# Altium PCB SW8-AcousticsPowerBoard.PcbDoc
Units mil, origin at the board's own origin, x right, y up, seen from the top; angles counter-clockwise.
Board outline 4500 x 2700 mil, 4 copper layers (Top Layer, Layer 1, PWR_OUT, GND), stack 23.756 mil thick; 32 components, 19 nets, 111 pads, 38 vias.
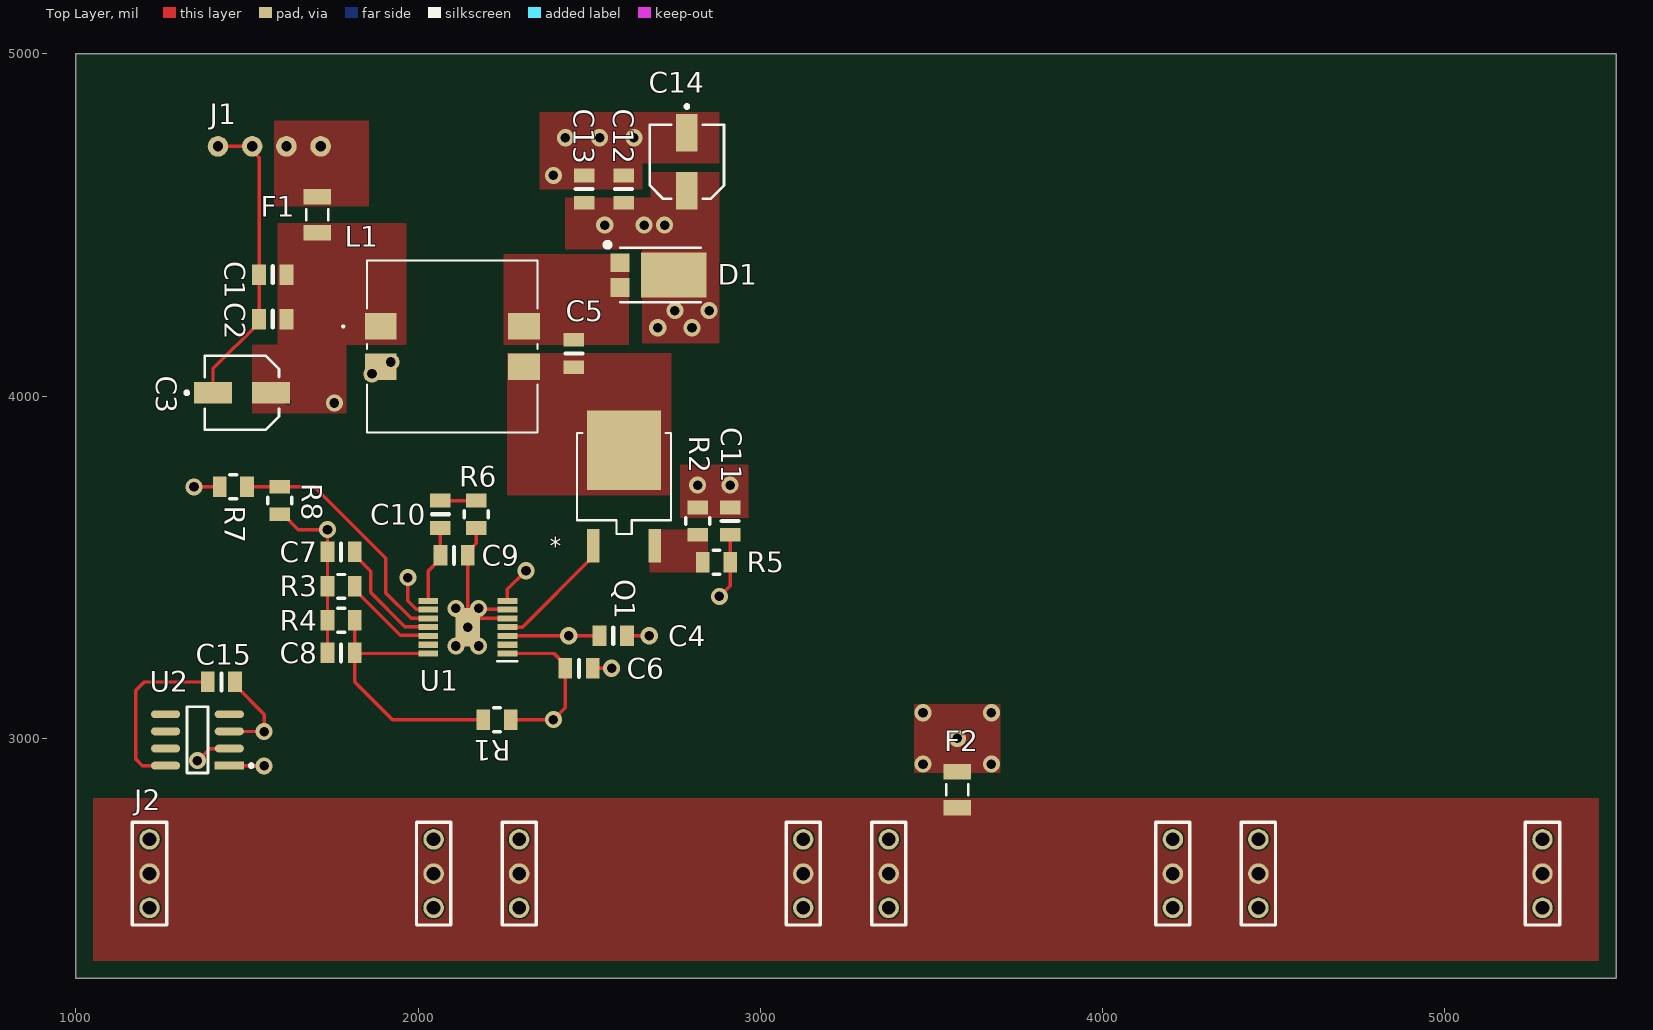
[diagram p0: Top Layer view]
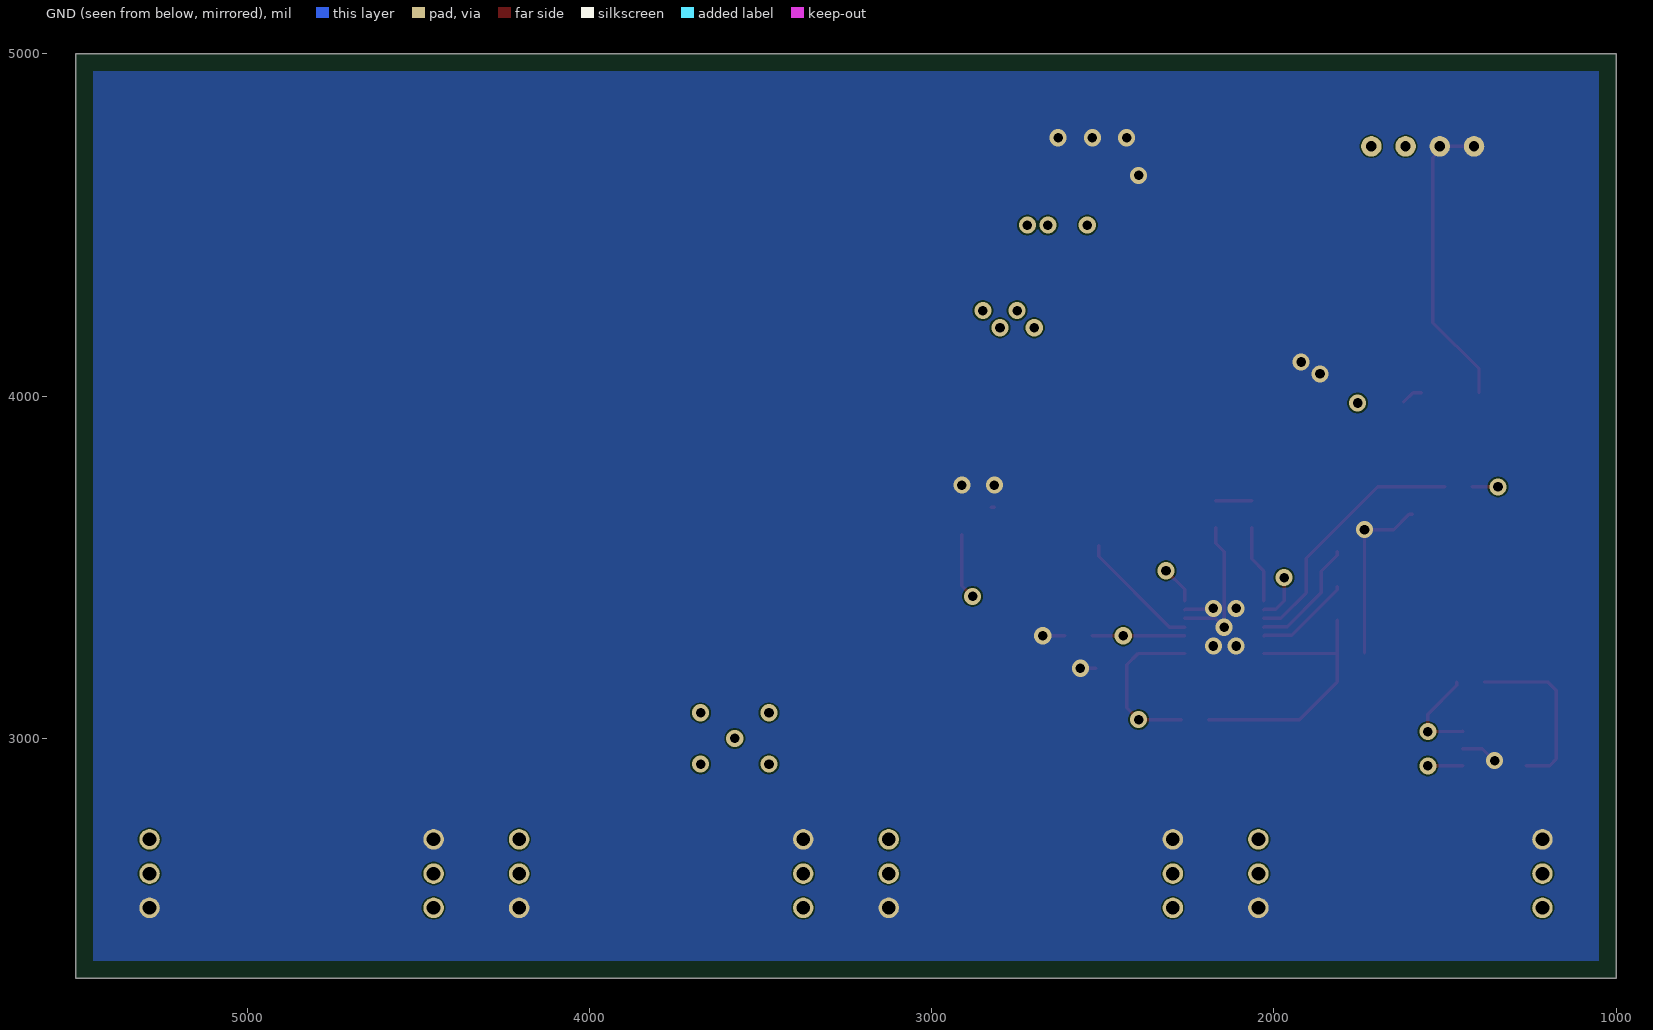
[diagram p1: GND view, seen from below]
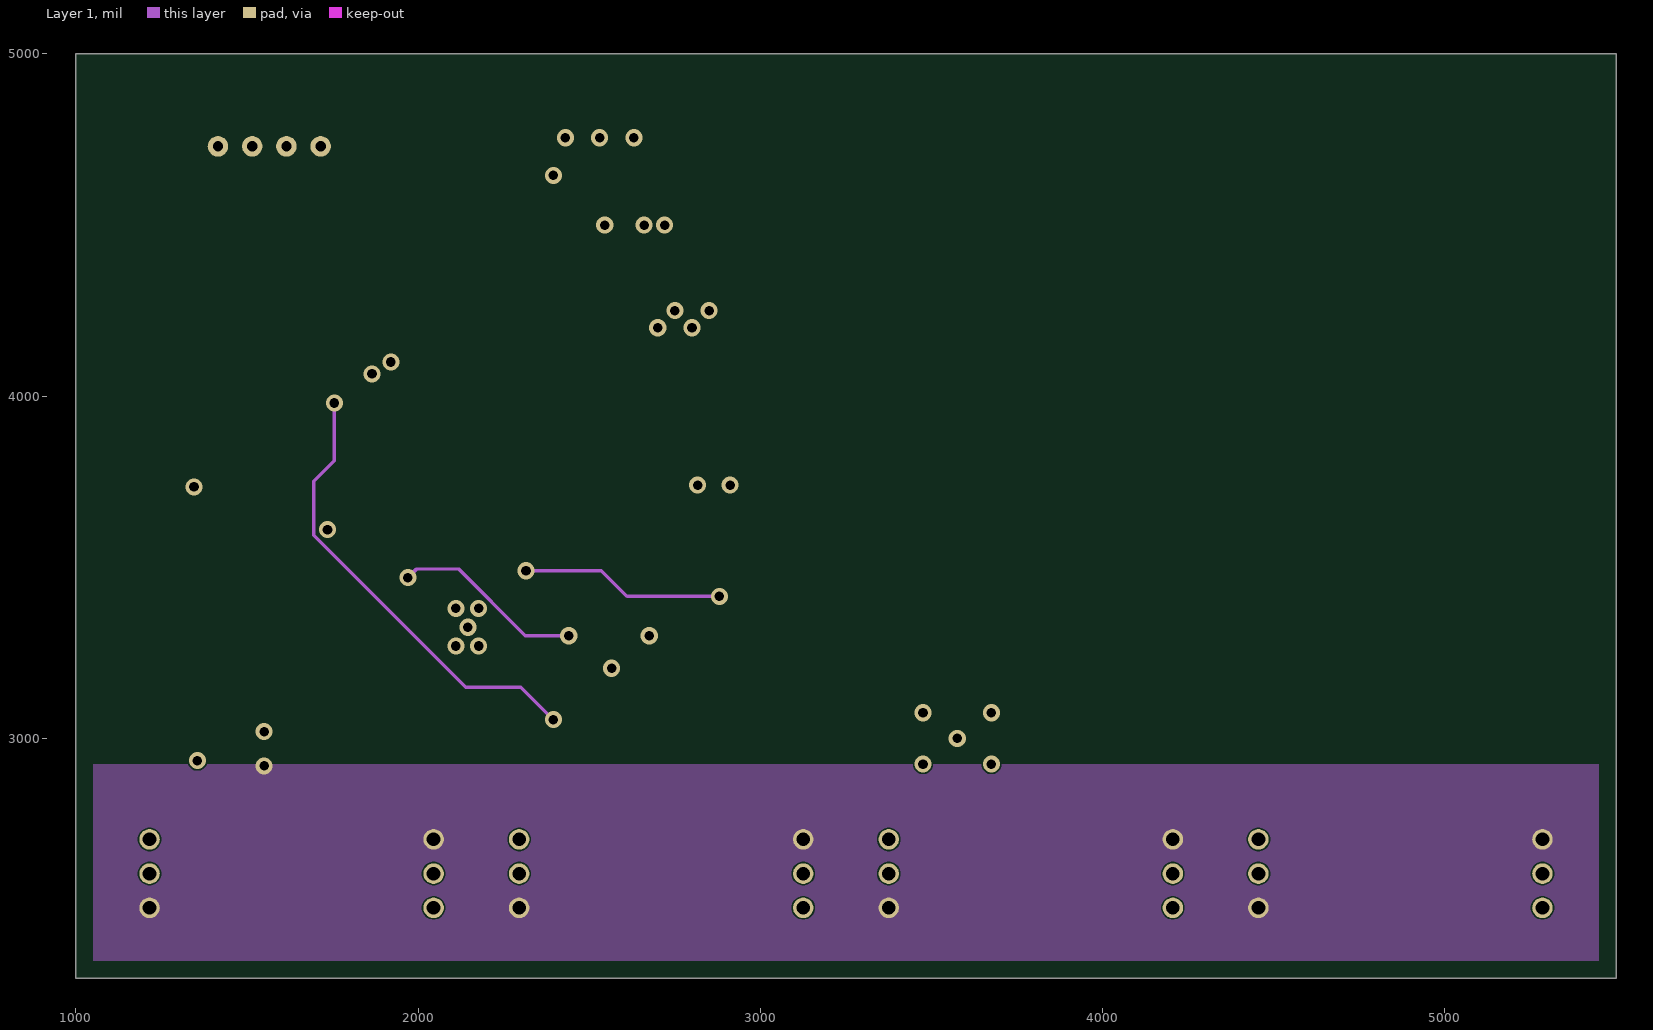
[diagram p2: Layer 1]
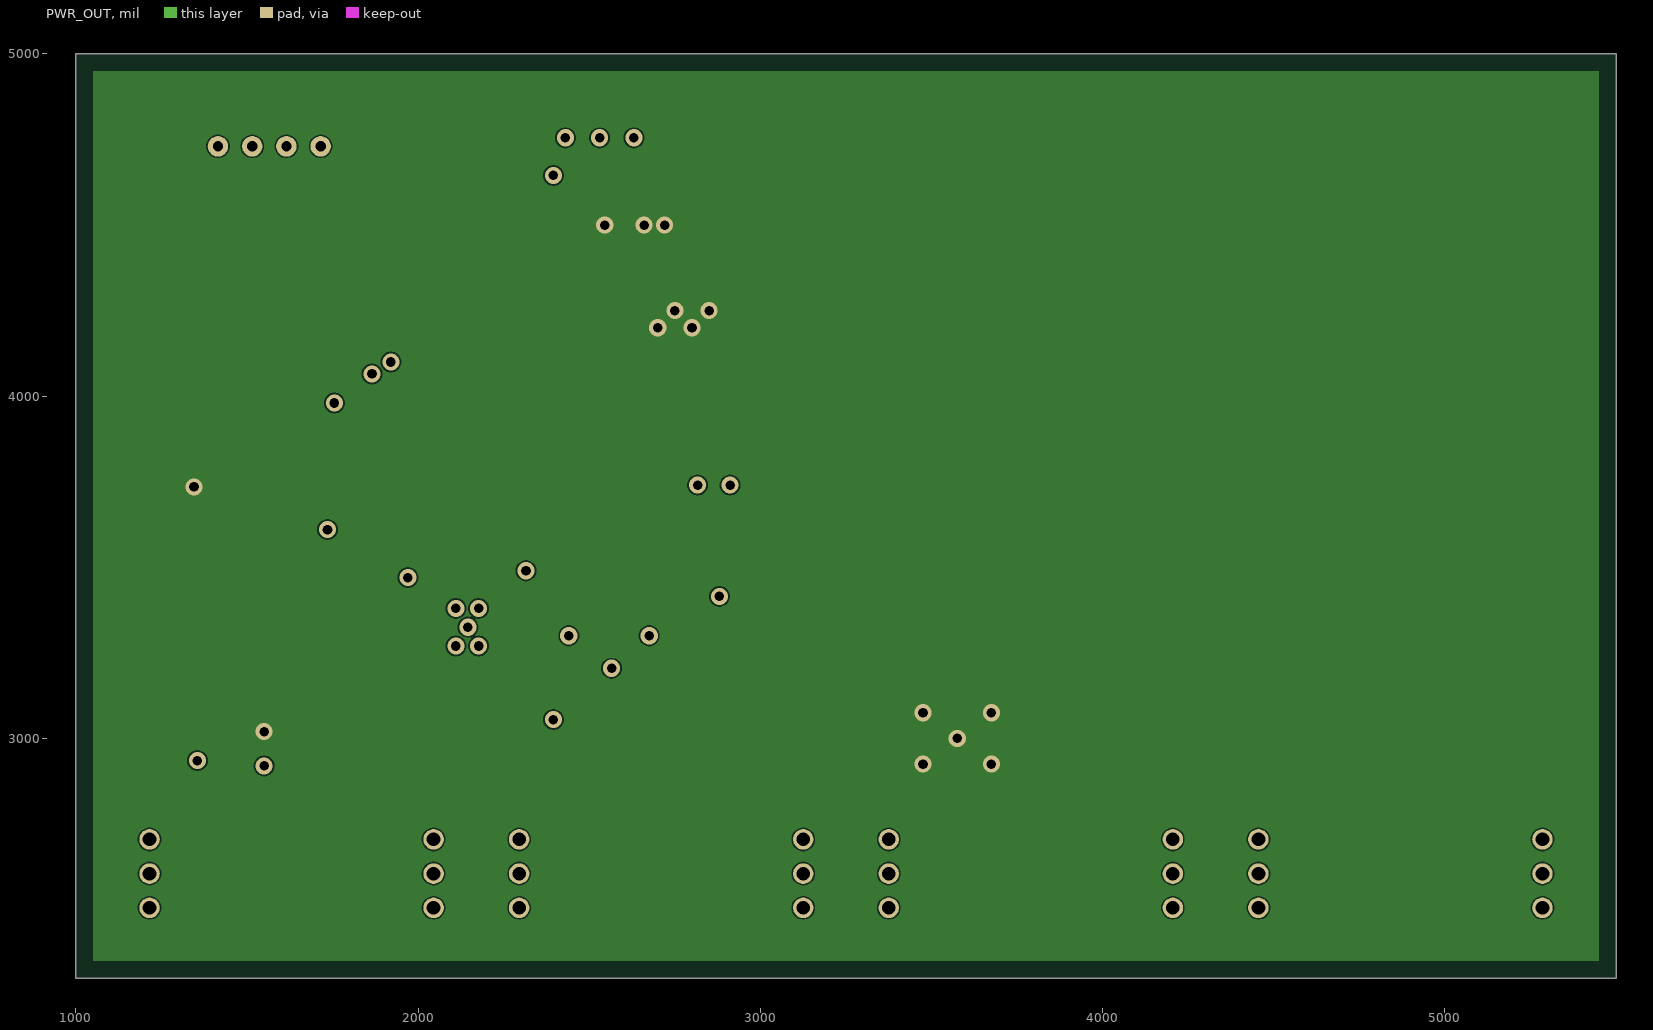
[diagram p3: PWR_OUT]

## Layer stack, top to bottom
Top Solder: solder mask 0.4, Solder Resist, Dk 3.5
Top Layer: signal copper 1.4
Dielectric 2: prepreg 2.8, PP-006, Dk 4.1
Layer 1: signal copper 1.378
Dielectric 1: dielectric 12.6, FR-4, Dk 4.8
PWR_OUT: signal copper 1.378
Dielectric 3: prepreg 2.8, PP-006, Dk 4.1
GND: signal copper 1.4
Bottom Solder: solder mask 0.4, Solder Resist, Dk 3.5

## Board outline
5500,2300 5500,5000 1000,5000 1000,2300

## Design rules (kind name [scope] priority, off if disabled: settings)
BoardOutlineClearance [All] p1: gap=7.87 ignorepadtopadclearanceinfootprint=FALSE
Clearance [All] p1: gap=4 ignorepadtopadclearanceinfootprint=FALSE except(5: Arc-Via Track-Via SMDPad-Via THPad-Via Via-Via Via-Fill Via-Poly Via-Region Via-Text; 9.84: Arc-Hole Track-Hole SMDPad-Hole THPad-Hole Via-Hole Fill-Hole Poly-Hole Region-Hole Text-Hole)
ComponentClearance [All] p1: gap=4 collisioncheckmode=3 verticalgap=4 showdistances=TRUE
DiffPairsRouting [All] p1: maxlimit=4 minlimit=4 mostfreqgap=4 toplayer_minwidth=4 toplayer_maxwidth=71497.94 toplayer_prefwidth=4 midlayer1_minwidth=4 midlayer1_maxwidth=71497.94 midlayer1_prefwidth=4 midlayer2_minwidth=4 midlayer2_maxwidth=71497.94 midlayer2_prefwidth=4 bottomlayer_minwidth=4 bottomlayer_maxwidth=71497.94 bottomlayer_prefwidth=4 maxuncoupledlength=500
Height [All] p1: minheight=0 maxheight=71497.94 prefheight=500
HoleSize [All] p1: absolutevalues=TRUE maxlimit=248.03 minlimit=7.87 maxpercent=80.000 minpercent=20.000
HoleToHoleClearance [All] p1: gap=9.84 allowstackedmicrovias=FALSE
MinimumAnnularRing [All] p1: minimumring=3
MinimumSolderMaskSliver [All] p1: minsoldermaskwidth=0
PlaneClearance [All] p1: clearance=4
PlaneConnect PlaneConnectPowerPads [InPadClass('PowerPads')] p1: planeconnectstyle=Direct reliefexpansion=20 reliefentries=4 reliefconductorwidth=10 reliefairgap=10
PlaneConnect [All] p2: pad.planeconnectstyle=Relief pad.reliefexpansion=11.81 pad.reliefentries=4 pad.reliefconductorwidth=4 pad.reliefairgap=4 via.planeconnectstyle=Direct via.reliefexpansion=11.81 via.reliefentries=4 via.reliefconductorwidth=5 via.reliefairgap=5
PolygonConnect PolygonConnectPowerPads [All vs (InPadClass('PowerPads'))] p1: connectstyle=Direct reliefconductorwidth=10 reliefentries=4 polygonreliefangle="90 Angle" airgapwidth=10
PolygonConnect [All] p2: connectstyle=Direct reliefconductorwidth=4 reliefentries=4 polygonreliefangle="90 Angle" airgapwidth=4
RoutingVias [All] p1: holewidth=7.87 width=17.72 viastyle="Through Hole" minholewidth=7.87 minwidth=17.72 maxholewidth=248.03 maxwidth=257.87
SilkToSilkClearance [All] p1: silktosilkclearance=0
SilkToSolderMaskClearance [IsPad] p1: minsilkscreentomaskgap=4 clearancetoexposedcopper=TRUE
SolderMaskExpansion [All] p1: expansion=2.95 istentingtop=FALSE
Width [All] p1: maxlimit=71497.94 minlimit=4 preferedwidth=4
20 further rules are at their usual default settings.

## Components (designator, comment, footprint, x,y, rotation, side; value= is the part's Value field where it differs from the comment)
C1 "10µF" SMD-0805C 1575,4355 r270 top
C2 "10µF" SMD-0805C 1575,4225 r270 top
C3 "EEE1VA100SR" FP-SC-MFG 1485,4010 r0 top
C4 "1µF" SMD-0805C 2570,3300 r90 top
C5 "3.3µF" SMD-0805C 2455,4125 r180 top
C6 "0.10µF" SMD-0805C 2470,3205 r90 top
C7 "1µF" SMD-0805C 1775,3545 r270 top
C8 "100pF" SMD-0805C 1775,3250 r270 top
C9 "390pF" SMD-0805C 2105,3535 r90 top
C10 "820pF" SMD-0805C 2065,3655 r180 top
C11 "100pF" SMD-0805C 2911.43,3635 r180 top
C12 "4.7µF" SMD-0805C 2600,4605 r180 top
C13 "4.7µF" SMD-0805C 2485,4605 r180 top
C14 "EEE1VA100SR" FP-SC-MFG 2785,4685 r270 top
C15 "0.10µF" SMD-0805C 1425,3165 r90 top
D1 "PDS560-13" POWERDI5 2746.77,4353.78 r270 top
F1 "0466002.NR" FP-0466-MFG 1705,4530 r270 top value=0.03Ω
F2 "0466001.NR" FP-0466-MFG 3575,2850 r270 top value=0.075Ω
J1 "1x4 Header" "1X4 HEADER" 1615,4530 r0 top
J2 "Acoustics_Powerboard_Headers" Acoustics_Powerboard_Headers 5285,2505 r180 top
L1 "DRQ125-3R3-R" DRQ125 2100,4145 r0 top
Q1 "NTD250N65S3H" TO252_NTD250_ONS 2601.43,3765 r0 top
R1 "143k" SMD-0805-RES 2230,3055 r90 top
R2 "0.03" SMD-0805-RES 2816.43,3635 r180 top
R3 "10.5k" SMD-0805-RES 1775,3444 r90 top
R4 "36k" SMD-0805-RES 1775,3345 r90 top
R5 "100" SMD-0805-RES 2871.43,3515 r270 top
R6 "44.2k" SMD-0805-RES 2170,3655 r180 top
R7 "42.2k" SMD-0805-RES 1460,3735 r270 top
R8 "4.7k" SMD-0805-RES 1595,3695 r180 top
U1 "LM5156HPWPR" SOP65P640X120-15N 2145,3325 r180 top
U2 "TLE2426CDR" FP-D0008A-IPC_B 1355,2995.66 r180 top

## Footprints (in the part's own frame and the unit in brackets; to place one, negate y for a bottom-side part, rotate by r counter-clockwise, add the part's x,y. Pads: shape width x height; smd on the part's side, far side on the other; paste and mask are expansions set on the pad)
"1X4 HEADER" [mil]
  round 60 hole 30: 1(-200,200) 2(-100,200) 3(0,200) 4(100,200)
Acoustics_Powerboard_Headers [mil]
  round 60 hole 40: 1(0,0) 1(830,-200) 1(1080,0) 1(1910,-200) 1(2160,0) 1(2990,-200) 1(3240,0) 1(4070,-200) 2(0,-100) 2(830,-100) 2(1080,-100) 2(1910,-100) 2(2160,-100) 2(2990,-100) 2(3240,-100) 2(4070,-100) 3(0,-200) 3(830,0) 3(1080,-200) 3(1910,0) 3(2160,-200) 3(2990,0) 3(3240,-200) 3(4070,0)
  silkscreen extent -50,-250 4120,50, body extent -50,-250 4120,50, height 374
DRQ125 [mil]
  rect 93x77 smd paste+0 mask+0: 1(-209.5,59.06) 2(-209.5,-59.06) 3(209.5,-59.06) 4(209.5,59.06)
  silkscreen extent -322,-251 249,251, body extent -244,-246 244,246, height 236
FP-0466-MFG [mil]
  rect 45x80 smd paste+0 mask+0: 1(-52.5,0) 2(52.5,0)
  silkscreen extent -15,-32 15,32, body extent -79,-44 79,44, height 10
FP-D0008A-IPC_B [mil]
  rect 85.4x22.92 smd paste+0 mask+0: 1(-93.06,75)
  rrect100% 85.4x22.92 smd paste+0 mask+0: 2(-93.06,25) 3(-93.06,-25) 4(-93.06,-75) 5(93.06,-75) 6(93.06,-25) 7(93.06,25) 8(93.06,75)
  silkscreen extent -162,-97 31,97, body extent -146,-106 146,106, height 10
FP-SC-MFG [mm]
  rect 2.8x1.6 smd paste+0 mask+0: 1(-2.15,0) 2(2.15,0)
  silkscreen extent -4.22,-2.75 2.75,2.75, body extent -3.8,-3 3.8,3, height 0.25
POWERDI5 [mm]
  rect 1.39x1.4 smd: 1(-0.92,-3.982) 2(0.92,-3.982)
  rect 3.36x4.86 smd: 3(0,0)
  silkscreen extent -2.41,-5.08 2.02,1.98, body extent -2.06,-4.54 1.84,1.86, height 1.05
SMD-0805-RES [mil]
  rect 60x40 smd: 1(0,40) 2(0,-40)
  silkscreen extent -35,-10 35,10, body extent -24,-39 26,39, height 31
SMD-0805C [mil]
  rect 60x40 smd: 1(0,40) 2(0,-40)
  silkscreen extent -25,0 25,0, body extent -25,-39 25,39, height 35
SOP65P640X120-15N [mm]
  rect 1.475x0.45 smd: 1(-2.938,1.95) 2(-2.938,1.3) 3(-2.938,0.65) 4(-2.938,0) 5(-2.938,-0.65) 6(-2.938,-1.3) 7(-2.938,-1.95) 8(2.938,-1.95) 9(2.938,-1.3) 10(2.938,-0.65) 11(2.938,0) 12(2.938,0.65) 13(2.938,1.3) 14(2.938,1.95)
  rect 1.82x2.86 smd: 15(0,0)
  silkscreen extent -3.67,2.52 -2.2,2.52, body extent -3.2,-2.5 3.2,2.5, height 1.2
TO252_NTD250_ONS [mil]
  rect 37x98 smd paste+0 mask+0: 1(-89.96,-202.5) 3(89.96,-202.5)
  rect 217x233 smd paste+0 mask+0: 2(0,77)
  silkscreen extent -138,-168 138,128, body extent -133,-238 133,173, height 94

## Part data
C1 C2: library part GRM219R61E106KA12D, "CAP CER 10UF 25V X5R 0805", Digi-Key Part Number=490-7207-1-ND, Manufacturer="Murata Electronics North America", Operating Temperature="-55°C ~ 85°C", Package / Case="0805 (2012 Metric)", Ratings=-, Temperature Coefficient=X5R, Tolerance=±10%, Voltage=25V, @ qty=0, Applications="General Purpose", Datasheets=http://www.murata.com/~/media/webrenewal/support/library/catalog/products/capacitor/mlcc/c02e.pdf, Factory Stock=0, Features="Derating Recommended", Height - Seated (Max)=-, Image=//media.digikey.com/Renders/Murata%20Renders/0805%20(2012%20Metric)%20.85mm.jpg, Lead Spacing=-, Lead Style=-, Minimum Quantity=1, Mounting Type="Surface Mount, MLCC", Packaging="Cut Tape (CT)", Part Number=GRM219R61E106KA12D, Part Status=Active, Quantity Available=109571, Series=GRM, Size / Dimension="0.079\" L x 0.049\" W (2.01mm x 1.25mm)", Thickness (Max)="0.037\" (0.95mm)", Unit Price (USD)=0.24
C3 C14: library part CMP-05427-000087-1, "CAP ALUM 10UF 20% 35V SMD", Capacitance=10uF, Case/Package=Radial, Leakage Current=3uA, Max Operating Temperature=85°C, Min Operating Temperature=-40°C, Package Quantity=1, Ripple Current=30mA, Tolerance=20%, Voltage=35V, Construction=Cylindrical, Contact Plating=Tin, Diameter=5mm, Height=5.4mm, Height - Seated (Max)=0.213inch, Lead Length=2.2mm, Lead Pitch=1.5mm, Length=5.5mm, Life (Hours)=2000Hour, Mount="Surface Mount", Number of Pins=2, Packaging="Tape and Reel", Radiation Hardening=No, REACH SVHC="No SVHC", Ripple Current (AC)=30mA, RoHS Compliant=Yes, Series=S, Termination=SMD/SMT, Voltage Rating=35V, Voltage Rating (DC)=35V, Width=5.3mm
C4 C7: library part GCJ21BR71E105KA12L, "CAP CER 1UF 25V X7R 0805", Digi-Key Part Number=490-5802-1-ND, Manufacturer="Murata Electronics North America", Operating Temperature="-55°C ~ 125°C", Package / Case="0805 (2012 Metric)", Ratings=AEC-Q200, Temperature Coefficient=X7R, Tolerance=±10%, Voltage=25V, @ qty=0, Applications="Automotive, Boardflex Sensitive", Datasheets=http://www.murata.com/~/media/webrenewal/support/library/catalog/products/capacitor/mlcc/c03e.ashx, Factory Stock=0, Features="Soft Termination", Height - Seated (Max)=-, Image=//media.digikey.com/Renders/Murata%20Renders/0805%20(2012%20Metric)%20.85mm.jpg, Lead Spacing=-, Lead Style=-, Minimum Quantity=1, Mounting Type="Surface Mount, MLCC", Packaging="Cut Tape (CT)", Part Number=GCJ21BR71E105KA12L, Part Status=Active, Quantity Available=15950, Series=GCJ, Size / Dimension="0.079\" L x 0.049\" W (2.00mm x 1.25mm)", Thickness (Max)="0.057\" (1.45mm)", Unit Price (USD)=0.36
C5: library part GRM21BR61E335KA12L, "CAP CER 3.3UF 25V X5R 0805", Digi-Key Part Number=490-8313-1-ND, Manufacturer="Murata Electronics North America", Operating Temperature="-55°C ~ 85°C", Package / Case="0805 (2012 Metric)", Ratings=-, Temperature Coefficient=X5R, Tolerance=±10%, Voltage=25V, @ qty=0, Applications="General Purpose", Datasheets=http://www.murata.com/~/media/webrenewal/support/library/catalog/products/capacitor/mlcc/c02e.pdf, Factory Stock=0, Features=-, Height - Seated (Max)=-, Image=//media.digikey.com/Renders/Murata%20Renders/0805%20(2012%20Metric)%20.85mm.jpg, Lead Spacing=-, Lead Style=-, Minimum Quantity=1, Mounting Type="Surface Mount, MLCC", Packaging="Cut Tape (CT)", Part Number=GRM21BR61E335KA12L, Part Status=Active, Quantity Available=9547, Series=GRM, Size / Dimension="0.079\" L x 0.049\" W (2.00mm x 1.25mm)", Thickness (Max)="0.053\" (1.35mm)", Unit Price (USD)=0.42
C6 C15: library part GCD21BR71H104KA01L, "CAP CER 0.1UF 50V X7R 0805", Digi-Key Part Number=490-11955-1-ND, Manufacturer="Murata Electronics North America", Operating Temperature="-55°C ~ 125°C", Package / Case="0805 (2012 Metric)", Ratings=AEC-Q200, Temperature Coefficient=X7R, Tolerance=±10%, Voltage=50V, @ qty=0, Applications=Automotive, Datasheets=http://www.murata.com/~/media/webrenewal/support/library/catalog/products/capacitor/mlcc/c03e.ashx, Factory Stock=0, Features=-, Height - Seated (Max)=-, Image=//media.digikey.com/Renders/Murata%20Renders/0805%28GxM6%29.jpg, Lead Spacing=-, Lead Style=-, Minimum Quantity=1, Mounting Type="Surface Mount, MLCC", Packaging="Cut Tape (CT)", Part Number=GCD21BR71H104KA01L, Part Status=Active, Quantity Available=157, Series=GCD, Size / Dimension="0.079\" L x 0.049\" W (2.00mm x 1.25mm)", Thickness (Max)="0.049\" (1.25mm)", Unit Price (USD)=0.24
C8 C11: library part GCM2165C1H101JA16D, "CAP CER 100PF 50V NP0 0805", Digi-Key Part Number=490-8031-1-ND, Manufacturer="Murata Electronics North America", Operating Temperature="-55°C ~ 125°C", Package / Case="0805 (2012 Metric)", Ratings=AEC-Q200, Temperature Coefficient="C0G, NP0", Tolerance=±5%, Voltage=50V, @ qty=0, Applications=Automotive, Datasheets=http://www.murata.com/~/media/webrenewal/support/library/catalog/products/capacitor/mlcc/c03e.ashx, Factory Stock=0, Features=-, Height - Seated (Max)=-, Image=//media.digikey.com/Renders/Murata%20Renders/0805%28GxM6%29.jpg, Lead Spacing=-, Lead Style=-, Minimum Quantity=1, Mounting Type="Surface Mount, MLCC", Packaging="Cut Tape (CT)", Part Number=GCM2165C1H101JA16D, Part Status=Active, Quantity Available=42017, Series=GCM, Size / Dimension="0.079\" L x 0.049\" W (2.00mm x 1.25mm)", Thickness (Max)="0.028\" (0.70mm)", Unit Price (USD)=0.13
C9: library part GRM2165C1H391JA01D, "CAP CER 390PF 50V NP0 0805", Digi-Key Part Number=490-11547-1-ND, Manufacturer="Murata Electronics North America", Operating Temperature="-55°C ~ 125°C", Package / Case="0805 (2012 Metric)", Ratings=-, Temperature Coefficient="C0G, NP0", Tolerance=±5%, Voltage=50V, @ qty=0, Applications="General Purpose", Datasheets=http://www.murata.com/~/media/webrenewal/support/library/catalog/products/capacitor/mlcc/c02e.pdf, Factory Stock=0, Features=-, Height - Seated (Max)=-, Image=//media.digikey.com/Renders/Murata%20Renders/0805%20(2012%20Metric)%20.85mm.jpg, Lead Spacing=-, Lead Style=-, Minimum Quantity=1, Mounting Type="Surface Mount, MLCC", Packaging="Cut Tape (CT)", Part Number=GRM2165C1H391JA01D, Part Status=Active, Quantity Available=7599, Series=GRM, Size / Dimension="0.079\" L x 0.049\" W (2.00mm x 1.25mm)", Thickness (Max)="0.028\" (0.70mm)", Unit Price (USD)=0.19
C10: library part GRM2165C1H821JA01D, "CAP CER 820PF 50V NP0 0805", Digi-Key Part Number=490-11551-1-ND, Manufacturer="Murata Electronics North America", Operating Temperature="-55°C ~ 125°C", Package / Case="0805 (2012 Metric)", Ratings=-, Temperature Coefficient="C0G, NP0", Tolerance=±5%, Voltage=50V, @ qty=0, Applications="General Purpose", Datasheets=http://www.murata.com/~/media/webrenewal/support/library/catalog/products/capacitor/mlcc/c02e.pdf, Factory Stock=0, Features=-, Height - Seated (Max)=-, Image=//media.digikey.com/Renders/Murata%20Renders/0805%20(2012%20Metric)%20.85mm.jpg, Lead Spacing=-, Lead Style=-, Minimum Quantity=1, Mounting Type="Surface Mount, MLCC", Packaging="Cut Tape (CT)", Part Number=GRM2165C1H821JA01D, Part Status=Active, Quantity Available=17274, Series=GRM, Size / Dimension="0.079\" L x 0.049\" W (2.00mm x 1.25mm)", Thickness (Max)="0.028\" (0.70mm)", Unit Price (USD)=0.21
C12 C13: library part GRM21BC71H475KE11L, "CAP CER 4.7UF 50V X7S 0805", Digi-Key Part Number=490-12757-1-ND, Manufacturer="Murata Electronics North America", Operating Temperature="-55°C ~ 125°C", Package / Case="0805 (2012 Metric)", Ratings=-, Temperature Coefficient=X7S, Tolerance=±10%, Voltage=50V, @ qty=0, Applications="General Purpose", Datasheets=http://www.murata.com/~/media/webrenewal/support/library/catalog/products/capacitor/mlcc/c02e.pdf, Factory Stock=0, Features=-, Height - Seated (Max)=-, Image=//media.digikey.com/Renders/Murata%20Renders/0805%20(2012%20Metric)%20.85mm.jpg, Lead Spacing=-, Lead Style=-, Minimum Quantity=1, Mounting Type="Surface Mount, MLCC", Packaging="Cut Tape (CT)", Part Number=GRM21BC71H475KE11L, Part Status=Active, Quantity Available=6797, Series=GRM, Size / Dimension="0.079\" L x 0.049\" W (2.00mm x 1.25mm)", Thickness (Max)="0.057\" (1.45mm)", Unit Price (USD)=0.47
D1: "Diode", Manufacturer_Name="Diodes Inc.", Manufacturer_Part_Number=PDS560-13
F1: library part CMP-2000-05742-2, "FUSE BOARD MNT 2A 63VAC/VDC 1206", Fuse Current=2A, Fuse Interrupt Ac Current=50A, Fuse Voltage Drop=78.73mV, Manufacturer=Littelfuse, Max Fuse Ac Voltage=63V, Package=0466, Resistance=0.03Ω, Temperature="-55°C to +90°C", Temperature Range High=+90°C, Temperature Range Low=-55°C, Automotive=No, Category=Fuse, ComponentLink2Description=Datasheet, ComponentLink2URL=https://www.littelfuse.com/~/media/electronics/datasheets/fuses/littelfuse_fuse_466_datasheet.pdf.pdf, Device Class L1="Circuit Protection", Device Class L2=Fuses, Device Class L3=unset, Digikey Description="FUSE BOARD MNT 2A 63VAC/VDC 1206", Fuse Blow Speed=Fast, Fuse I2T=0.2326A2Sec, Fuse Interrupt Dc Current=50A, Height=0.66mm, Lead Free=Yes, Manufacturer Part Number=0466002.NR, Max Fuse Dc Voltage=63V, Mouser Description="466 Series Very Fast-Acting 63 V 2 A 1206 Surface Mount Thin Film Fuse", Octopart=https://octopart.com/0466002.nr-littelfuse-566006, RoHS=TRUE, Voltage Rating=63V
F2: library part CMP-08605-000058-1, "FUSE BOARD MNT 1A 63VAC/VDC 1206", Fuse Current=1A, Fuse Interrupt Ac Current=50A, Fuse Voltage Drop=79.97mV, Manufacturer="Littelfuse Inc", Max Fuse Ac Voltage=63V, Package=0466, Resistance=0.075Ω, Temperature="-55°C to +90°C", Temperature Range High=+90°C, Temperature Range Low=-55°C, Automotive=No, Category=Fuse, ComponentLink2Description=Datasheet, ComponentLink2URL=https://www.littelfuse.com/~/media/electronics/datasheets/fuses/littelfuse_fuse_466_datasheet.pdf.pdf, Device Class L1="Circuit Protection", Device Class L2=Fuses, Device Class L3=unset, Digikey Description="FUSE BOARD MNT 1A 63VAC/VDC 1206", Fuse Blow Speed=Fast, Fuse I2T=0.0423A2Sec, Fuse Interrupt Dc Current=50A, Height=0.66mm, Lead Free=Yes, Manufacturer Part Number=0466001.NR, Max Fuse Dc Voltage=63V, Mouser Description="Surface Mount Fuses 63V FA 1206 1A VFA Slimline", Octopart=https://octopart.com/0466001.nr-littelfuse-566005, RoHS=TRUE, Voltage Rating=63V
J1: library part "1X4 Header", "CONN HEADER VERT 4POS 2.54MM", Manufacturer="Würth Elektronik", Manufacturer Part Number=61300411121
L1: "Shielded 2 Coil Inductor Array 12.34 µH Inductance - Connected in Series 3.084 µH Inductance - Connected in Parallel 6.3mOhm DC Resistance (DCR) - Parallel 9.26 A Nonstandard", Mfr_Name=Eaton, Copyright="Copyright (C) 2022 Ultra Librarian. All rights reserved.", Digi-Key_Part_Number_1=513-1285-1-ND, Digi-Key_Part_Number_2=513-1285-2-ND, Digi-Key_Part_Number_3=513-1285-6-ND, Manufacturer_Part_Number=DRQ125-3R3-R, RefDes=RefDes, Type=DEV
Q1: "No Description Available", Mfr_Name=onsemi, Copyright="Copyright (C) 2022 Ultra Librarian. All rights reserved.", Digi-Key_Part_Number_1=488-NTD250N65S3HTR-ND, Digi-Key_Part_Number_2=488-NTD250N65S3HCT-ND, Digi-Key_Part_Number_3=488-NTD250N65S3HDKR-ND, Manufacturer_Part_Number=NTD250N65S3H, RefDes=RefDes, Type=DEV
R1: library part ERJ-6ENF1433V, "RES SMD 143K OHM 1% 1/8W 0805", Digi-Key Part Number=P143KCCT-ND, Manufacturer="Panasonic Electronic Components", Operating Temperature="-55°C ~ 155°C", Package / Case="0805 (2012 Metric)", Power (Watts)="0.125W, 1/8W", Supplier Device Package=0805, Temperature Coefficient=±100ppm/°C, Tolerance=±1%, @ qty=1500, Composition="Thick Film", Datasheets=http://industrial.panasonic.com/www-cgi/jvcr13pz.cgi?E+PZ+3+AOA0002+ERJ6ENF1433V+7+WW, Factory Stock=0, Failure Rate=-, Features="Automotive AEC-Q200", Height - Seated (Max)="0.028\" (0.70mm)", Image=//media.digikey.com/Renders/Panasonic%20Renders/ERJ-0805%20Pkg.jpg, Minimum Quantity=1, Number of Terminations=2, Packaging="Cut Tape (CT)", Part Number=ERJ-6ENF1433V, Part Status=Active, Quantity Available=35953, Series=ERJ, Size / Dimension="0.079\" L x 0.049\" W (2.00mm x 1.25mm)", Unit Price (USD)=0.00729
R2: library part ERJ-6BWFR030V, "RES SMD 0.03 OHM 1% 1/2W 0805", Digi-Key Part Number=P.03AQCT-ND, Manufacturer="Panasonic Electronic Components", Operating Temperature="-55°C ~ 155°C", Package / Case="0805 (2012 Metric)", Power (Watts)="0.5W, 1/2W", Supplier Device Package=0805, Temperature Coefficient=±200ppm/°C, Tolerance=±1%, @ qty=1500, Composition="Thick Film", Datasheets=https://industrial.panasonic.com/cdbs/www-data/pdf/RDA0000/AOA0000C239.pdf, Factory Stock=0, Failure Rate=-, Features="Automotive AEC-Q200, Current Sense", Height - Seated (Max)="0.030\" (0.75mm)", Image=//media.digikey.com/Renders/Panasonic%20Renders/ERJ-0805%20Pkg.jpg, Minimum Quantity=1, Number of Terminations=2, Packaging="Cut Tape (CT)", Part Number=ERJ-6BWFR030V, Part Status=Active, Quantity Available=20255, Series=ERJ, Size / Dimension="0.079\" L x 0.049\" W (2.00mm x 1.25mm)", Unit Price (USD)=0.16031
R3: library part ERJ-6ENF1052V, "RES SMD 10.5K OHM 1% 1/8W 0805", Digi-Key Part Number=P10.5KCCT-ND, Manufacturer="Panasonic Electronic Components", Operating Temperature="-55°C ~ 155°C", Package / Case="0805 (2012 Metric)", Power (Watts)="0.125W, 1/8W", Supplier Device Package=0805, Temperature Coefficient=±100ppm/°C, Tolerance=±1%, @ qty=1500, Composition="Thick Film", Datasheets=http://industrial.panasonic.com/www-cgi/jvcr13pz.cgi?E+PZ+3+AOA0002+ERJ6ENF1052V+7+WW, Factory Stock=0, Failure Rate=-, Features="Automotive AEC-Q200", Height - Seated (Max)="0.028\" (0.70mm)", Image=//media.digikey.com/Renders/Panasonic%20Renders/ERJ-0805%20Pkg.jpg, Minimum Quantity=1, Number of Terminations=2, Packaging="Cut Tape (CT)", Part Number=ERJ-6ENF1052V, Part Status=Active, Quantity Available=20335, Series=ERJ, Size / Dimension="0.079\" L x 0.049\" W (2.00mm x 1.25mm)", Unit Price (USD)=0.00729
R4: library part ERJ-6ENF3602V, "RES SMD 36K OHM 1% 1/8W 0805", Digi-Key Part Number=P36.0KCCT-ND, Manufacturer="Panasonic Electronic Components", Operating Temperature="-55°C ~ 155°C", Package / Case="0805 (2012 Metric)", Power (Watts)="0.125W, 1/8W", Supplier Device Package=0805, Temperature Coefficient=±100ppm/°C, Tolerance=±1%, @ qty=1500, Composition="Thick Film", Datasheets=http://industrial.panasonic.com/www-cgi/jvcr13pz.cgi?E+PZ+3+AOA0002+ERJ6ENF3602V+7+WW, Factory Stock=0, Failure Rate=-, Features="Automotive AEC-Q200", Height - Seated (Max)="0.028\" (0.70mm)", Image=//media.digikey.com/Renders/Panasonic%20Renders/ERJ-0805%20Pkg.jpg, Minimum Quantity=1, Number of Terminations=2, Packaging="Cut Tape (CT)", Part Number=ERJ-6ENF3602V, Part Status=Active, Quantity Available=42552, Series=ERJ, Size / Dimension="0.079\" L x 0.049\" W (2.00mm x 1.25mm)", Unit Price (USD)=0.00729
R5: library part ERJ-6ENF1000V, "RES SMD 100 OHM 1% 1/8W 0805", Digi-Key Part Number=P100CCT-ND, Manufacturer="Panasonic Electronic Components", Operating Temperature="-55°C ~ 155°C", Package / Case="0805 (2012 Metric)", Power (Watts)="0.125W, 1/8W", Supplier Device Package=0805, Temperature Coefficient=±100ppm/°C, Tolerance=±1%, @ qty=1500, Composition="Thick Film", Datasheets=http://industrial.panasonic.com/www-cgi/jvcr13pz.cgi?E+PZ+3+AOA0002+ERJ6ENF1000V+7+WW, Factory Stock=0, Failure Rate=-, Features="Automotive AEC-Q200", Height - Seated (Max)="0.028\" (0.70mm)", Image=//media.digikey.com/Renders/Panasonic%20Renders/ERJ-0805%20Pkg.jpg, Minimum Quantity=1, Number of Terminations=2, Packaging="Cut Tape (CT)", Part Number=ERJ-6ENF1000V, Part Status=Active, Quantity Available=288663, Series=ERJ, Size / Dimension="0.079\" L x 0.049\" W (2.00mm x 1.25mm)", Unit Price (USD)=0.00729
R6: library part ERJ-6ENF4422V, "RES SMD 44.2K OHM 1% 1/8W 0805", Digi-Key Part Number=P44.2KCCT-ND, Manufacturer="Panasonic Electronic Components", Operating Temperature="-55°C ~ 155°C", Package / Case="0805 (2012 Metric)", Power (Watts)="0.125W, 1/8W", Supplier Device Package=0805, Temperature Coefficient=±100ppm/°C, Tolerance=±1%, @ qty=1500, Composition="Thick Film", Datasheets=http://industrial.panasonic.com/www-cgi/jvcr13pz.cgi?E+PZ+3+AOA0002+ERJ6ENF4422V+7+WW, Factory Stock=0, Failure Rate=-, Features="Automotive AEC-Q200", Height - Seated (Max)="0.028\" (0.70mm)", Image=//media.digikey.com/Renders/Panasonic%20Renders/ERJ-0805%20Pkg.jpg, Minimum Quantity=1, Number of Terminations=2, Packaging="Cut Tape (CT)", Part Number=ERJ-6ENF4422V, Part Status=Active, Quantity Available=47343, Series=ERJ, Size / Dimension="0.079\" L x 0.049\" W (2.00mm x 1.25mm)", Unit Price (USD)=0.00729
R7: library part ERJ-6ENF4222V, "RES SMD 42.2K OHM 1% 1/8W 0805", Digi-Key Part Number=P42.2KCCT-ND, Manufacturer="Panasonic Electronic Components", Operating Temperature="-55°C ~ 155°C", Package / Case="0805 (2012 Metric)", Power (Watts)="0.125W, 1/8W", Supplier Device Package=0805, Temperature Coefficient=±100ppm/°C, Tolerance=±1%, @ qty=1500, Composition="Thick Film", Datasheets=http://industrial.panasonic.com/www-cgi/jvcr13pz.cgi?E+PZ+3+AOA0002+ERJ6ENF4222V+7+WW, Factory Stock=0, Failure Rate=-, Features="Automotive AEC-Q200", Height - Seated (Max)="0.028\" (0.70mm)", Image=//media.digikey.com/Renders/Panasonic%20Renders/ERJ-0805%20Pkg.jpg, Minimum Quantity=1, Number of Terminations=2, Packaging="Cut Tape (CT)", Part Number=ERJ-6ENF4222V, Part Status=Active, Quantity Available=30408, Series=ERJ, Size / Dimension="0.079\" L x 0.049\" W (2.00mm x 1.25mm)", Unit Price (USD)=0.00729
R8: library part ERJ-6ENF4701V, "RES SMD 4.7K OHM 1% 1/8W 0805", Digi-Key Part Number=P4.70KCCT-ND, Manufacturer="Panasonic Electronic Components", Operating Temperature="-55°C ~ 155°C", Package / Case="0805 (2012 Metric)", Power (Watts)="0.125W, 1/8W", Supplier Device Package=0805, Temperature Coefficient=±100ppm/°C, Tolerance=±1%, @ qty=1500, Composition="Thick Film", Datasheets=http://industrial.panasonic.com/www-cgi/jvcr13pz.cgi?E+PZ+3+AOA0002+ERJ6ENF4701V+7+WW, Factory Stock=0, Failure Rate=-, Features="Automotive AEC-Q200", Height - Seated (Max)="0.028\" (0.70mm)", Image=//media.digikey.com/Renders/Panasonic%20Renders/ERJ-0805%20Pkg.jpg, Minimum Quantity=1, Number of Terminations=2, Packaging="Cut Tape (CT)", Part Number=ERJ-6ENF4701V, Part Status=Active, Quantity Available=312387, Series=ERJ, Size / Dimension="0.079\" L x 0.049\" W (2.00mm x 1.25mm)", Unit Price (USD)=0.00729
U1: "Integrated Circuit", Manufacturer_Name="Texas Instruments", Datasheet Link=https://www.ti.com/lit/gpn/lm5156h?HQS=ti-null-null-sf-df-pf-sep-wwe&DCM=yes, Height=1.2mm, Manufacturer_Part_Number=LM5156HPWPR
U2: library part CMP-04916-000011-1, "IC VREF GND REF 20V 1% 8SOIC", Case/Package=SOIC, Max Input Voltage=40V, Max Operating Temperature=125°C, Max Output Current=20mA, Max Output Voltage=20V, Min Operating Temperature=-55°C, Min Output Voltage=2V, Operating Supply Current=400uA, Package Quantity=1, Temperature Coefficient=35ppm/°C, Tolerance=1%, Height=1.58mm, Lead Free="Lead Free", Length=4.9mm, Mount="Surface Mount", Number of Pins=8, Output Current=20mA, Output Type=Adjustable, Output Voltage=20V, Packaging="Tape and Reel", Radiation Hardening=No, REACH SVHC="No SVHC", Reference Type="Ground Reference (Virtual)", Reference Voltage=20V, Weight=0.002677oz, Width=3.91mm

## Via types
v1: diameter 50, hole 28, Top Layer to GND, 38 vias

## Nets (pads, with @x,y where several pads share a name; then routed paths per layer and width w, separated by ;. In a path a pad name is that pad's centre, name@x,y a point inside that pad or via, vN(x,y) a via of type N, cw(c..) or ccw(c..) an arc to the next point about the centre after c; other vN are vias at no path point)
AGND: J2.3 U2.1 | length 102.2
  Top Layer w10: U2.1 1448.38,2920.33 1549.67,2920.33 v1(1550,2920)
BAT_IN: F1.1 J1.3 J1.4 | length 5.9
  Top Layer w10: J1.3 J1.3@1619.14,4734.14
COMP: C9.1 C10.1 U1.8 | length 228
  Top Layer w10: U1.8 2029.33,3489.33 2065,3525 C9.1 C10.1
CS: C11.1 R5.1 U1.7 | length 899.8
  Top Layer w10: U1.7 2260.67,3435.67 v1(2315,3490) ; v1(2880,3415) 2911.43,3446.43 R5.1 C11.1
  Layer 1 w10: v1(2315,3490) 2535,3490 2610,3415 v1(2880,3415)
DITHOFF/VCC: C4.1 U1.3 U1.9 | length 968.7
  Top Layer w10: v1(1970,3470) 1970,3402 1994.08,3377.91 2027.6,3377.91 U1.9 ; U1.3 2260.96,3299.7 2439.7,3299.7 v1(2440,3300) C4.1
  Layer 1 w10: v1(1970,3470) 1995,3495 2118.2,3495 2313.2,3300 v1(2440,3300)
FB: R7.1 R8.2 U1.10 | length 747.8
  Top Layer w10: R7.1 R8.2 1696.21,3735 1905,3526.21 1905,3425 1979.41,3350.59 U1.10
GATE: Q1.1 U1.4 | length 367
  Top Layer w10: U1.4 2260.9,3325.23 2304.7,3325.23 2511.47,3532 Q1.1
GND: C1.2 C2.2 C3.1 C4.2 C6.2 C7.2 C8.2 C9.2 C11.2 C12.2 C13.2 C14.1 J1.1 J1.2 J2.1 L1.2 R2.2 R3.1 R4.1 R6.1 R8.1 U1.5 U1.6 U1.15 U2.2 | length 2142.8
  Top Layer w10: v1(1355,2935) 1390.35,2970.35 1447.75,2970.35 U2.2 ; C3.1 1400.35,4080.35 1535,4215 C2.2 C1.2 1535,4696.47 1515,4716.47 J1.2 J1.1 ; R8.1 1605,3655 1650,3610 v1(1735,3610) C7.2 R3.1 R4.1 C8.2 ; R6.1 2170,3570 2145,3545 C9.2 v1(2145,3325) 2170.59,3350.59 U1.5 ; v1(2176.63,3380) 2178.72,3377.91 2258.94,3377.91 U1.6 ; C6.2@2520,3205 v1(2565,3205) ; C4.2 v1(2675,3300) ; R2.2 R2.2@2826.43,3675
  other v1: 2110,3270 2176.63,3270 2110,3380 2816.43,3740 2911.43,3740 1865,4065 1920,4100 2395,4645 2430,4755 2530,4755 2630,4755
NetC5_1: C5.1 L1.3 Q1.2
NetC5_2: C5.2 D1.1 D1.2 L1.4
NetC10_2: C10.2 R6.2 | length 105
  Top Layer w10: C10.2 R6.2
NetC15_1: C15.1 U2.8 | length 515.3
  Top Layer w10: U2.8 1194.34,2920.66 1175,2940 1175,3140 1200,3165 C15.1
NetF2_2: F2.2 J2.2
NetQ1_3: Q1.3 R2.1 R5.2
PWR_IN: C1.1 C2.1 C3.2 C6.1 F1.2 L1.1 R1.2 U1.1 | length 1878.1
  Top Layer w10: C3.2 1593.27,4010 C3.2@1619.76,3983.5 ; U1.1 2396.77,3248.23 2430,3215 C6.1 2430,3090 v1(2395,3055) R1.2
  Layer 1 w10: v1(1755,3980) 1755,3811.3 1695,3751.3 1695,3593.43 2138.43,3150 2300,3150 v1(2395,3055)
PWR_OUT: C12.1 C13.1 C14.2 C15.2 D1.3 F2.1 R7.2 U2.3 | length 368.2
  Top Layer w10: v1(1345,3735) R7.2 ; U2.3 1448.38,3020.33 1549.67,3020.33 v1(1550,3020) 1550,3070 1465,3155 C15.2 ; v1@3464.18,3075 v1(3475,3075)
  other v1: 3475,2925 3675,2925 3575,3000 3675,3075 2700,4200 2800,4200 2750,4250 2850,4250 2545,4500 2660,4500 2720,4500
RT: R3.2 U1.12 | length 280.1
  Top Layer w10: R3.2 1815,3434 1947.86,3301.14 2027.6,3301.14 U1.12
SS: C7.1 U1.11 | length 348.1
  Top Layer w10: C7.1 1815,3535 1860.9,3489.1 1860.9,3426.39 1960.55,3326.73 2027.6,3326.73 U1.11
UVLO: C8.1 R1.1 R4.2 U1.14 | length 815.6
  Top Layer w10: R4.2 C8.1 ; U1.14 1816.77,3248.23 C8.1 ; R1.1 1925,3055 1815,3165 C8.1
pads on no net: U1.2 U1.13 U2.4 U2.5 U2.6 U2.7

## Polygon pours and split planes (outlines as drawn)
PWR_OUT on Top Layer "PWR_OUT_L01_P036" (solid, pour order 36): 3450,2900 3700,2900 3700,3100 3450,3100
PWR_IN on Top Layer "PWR_IN_L01_P027" (solid, pour order 27): 1515,3950 1515,4150 1590,4150 1590,4505 1965,4505 1965,4150 1790,4150 1790,3950
GND on Top Layer "GND_L01_P038" (solid, pour order 38): 2880,4680 2655,4680 2655,4605 2355,4605 2355,4830 2880,4830
PWR_OUT on Top Layer "PWR_OUT_L01_P037" (solid, pour order 37): 2655,4155 2880,4155 2880,4655 2680,4655 2680,4580 2430,4580 2430,4430 2655,4430
NetF2_2 on Top Layer "NETF2_2_L01_P035" (solid, pour order 35): 1050,2825 5450,2825 5450,2350 1050,2350
BAT_IN on Top Layer "BAT_IN_L01_P031" (solid, pour order 31): 1580,4805 1580,4555 1855,4555 1855,4805
GND on Top Layer "GND_L01_P028" (solid, pour order 28): 2965,3800 2965,3645 2765,3645 2765,3800
NetC5_1 on Top Layer "NETC5_1_L01_P026" (solid, pour order 26): 2260,4125 2260,3710 2740,3710 2740,4125
NetC5_2 on Top Layer "NETC5_2_L01_P025" (solid, pour order 25): 2615,4415 2615,4150 2250,4150 2250,4415
NetQ1_3 on Top Layer "NETQ1_3_L01_P000" (solid, pour order 0): 2676.43,3610 2846.43,3610 2846.43,3485 2676.43,3485
AGND on Layer 1 "AGND_L02_P034" (solid, pour order 34): 1050,2925 5450,2925 5450,2350 1050,2350
PWR_OUT on PWR_OUT "PWR_OUT_L03_P039" (solid, pour order 39): 1050,4950 5450,4950 5450,2350 1050,2350
GND on GND "GND_L04_P041" (solid, pour order 41): 1050,4950 5450,4950 5450,2350 1050,2350

## Dimensions
1000,5000 to 5500,5000 on Mechanical 1
1000,5000 to 1000,2300 on Mechanical 1

## Text inside footprints (layer, text, board x,y; h text height)
Q1: Top Overlay "*" at 2384.01,3537.5 h50; Mechanical 13 "*" at 2498.97,3627.5 h50